# Altium PCB RFID2.PcbDoc (part 1 of 3)
Units mil, origin at the board's own origin, x right, y up, seen from the top; angles counter-clockwise.
Board outline 2824.02 x 3937.01 mil, 2 copper layers (Top Layer, Bottom Layer); 76 components, 32 nets, 236 pads, 16 vias.
Unrouted connection lines stored in the file: 34.
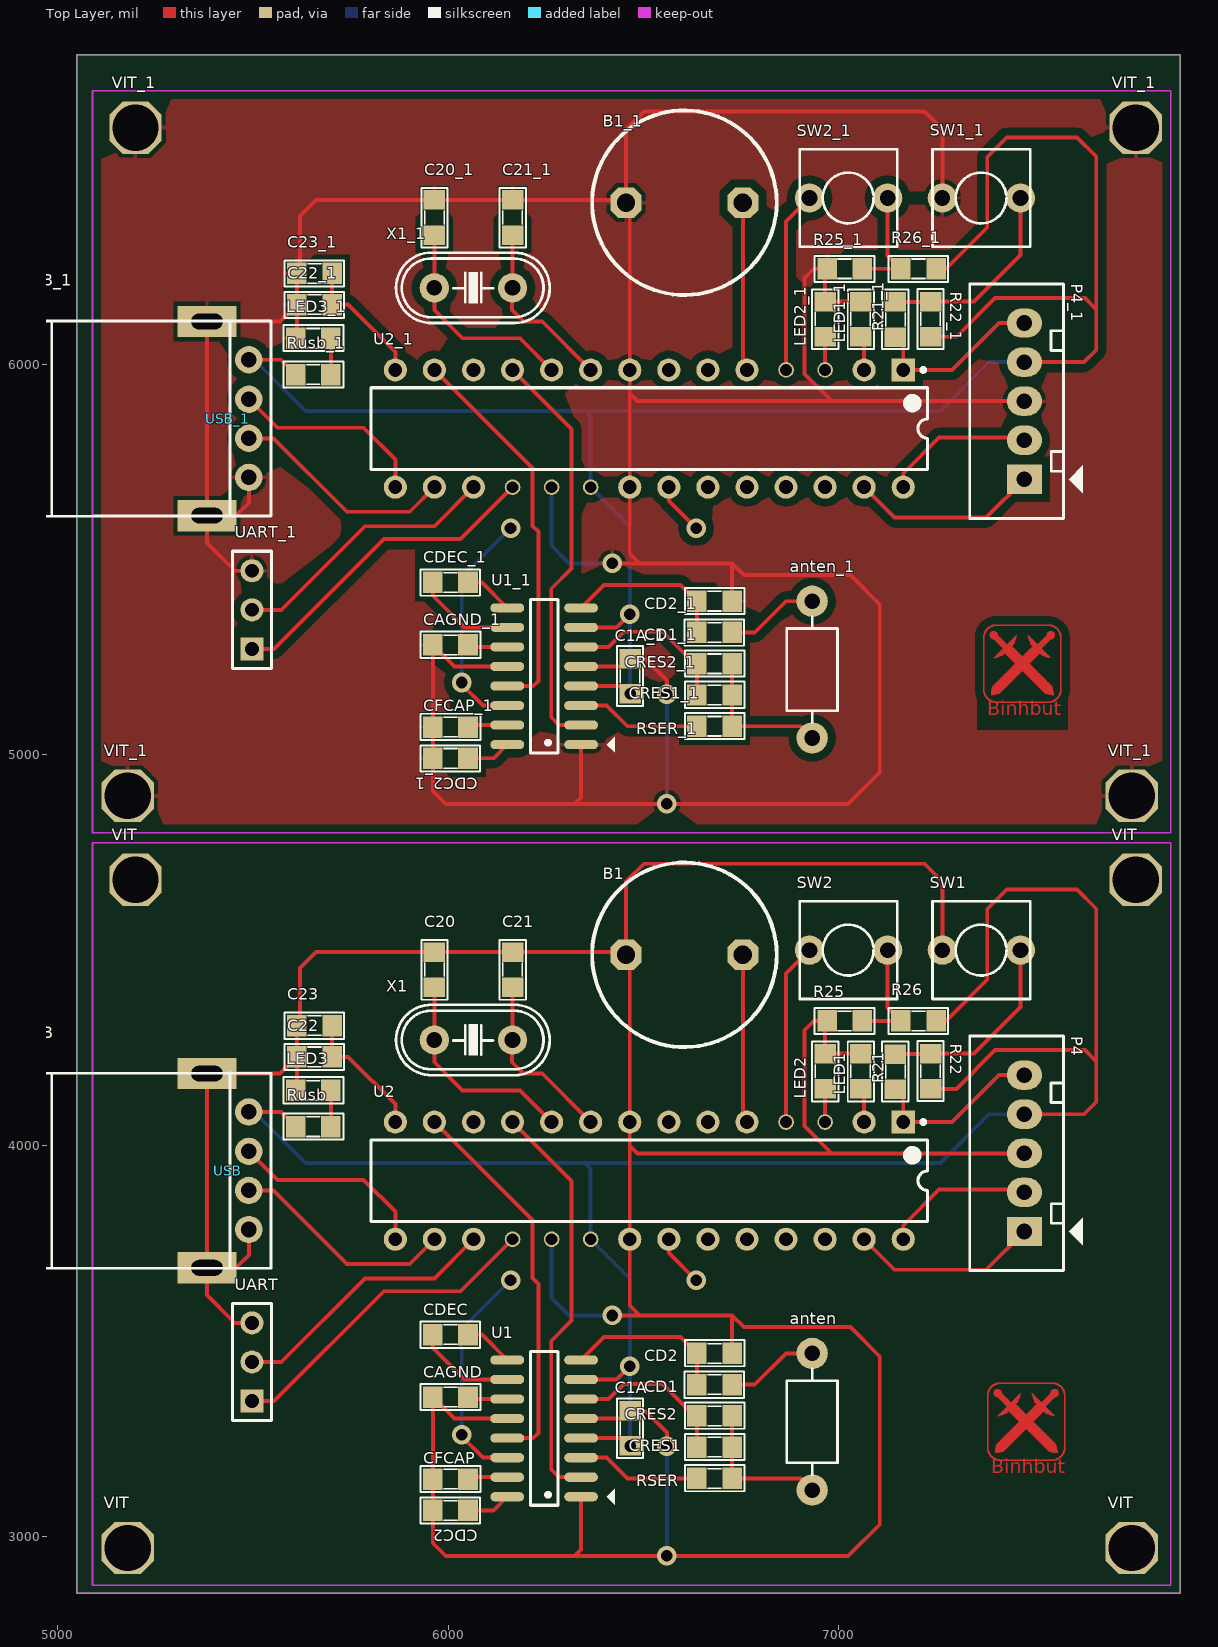
[diagram p0: Top Layer view]
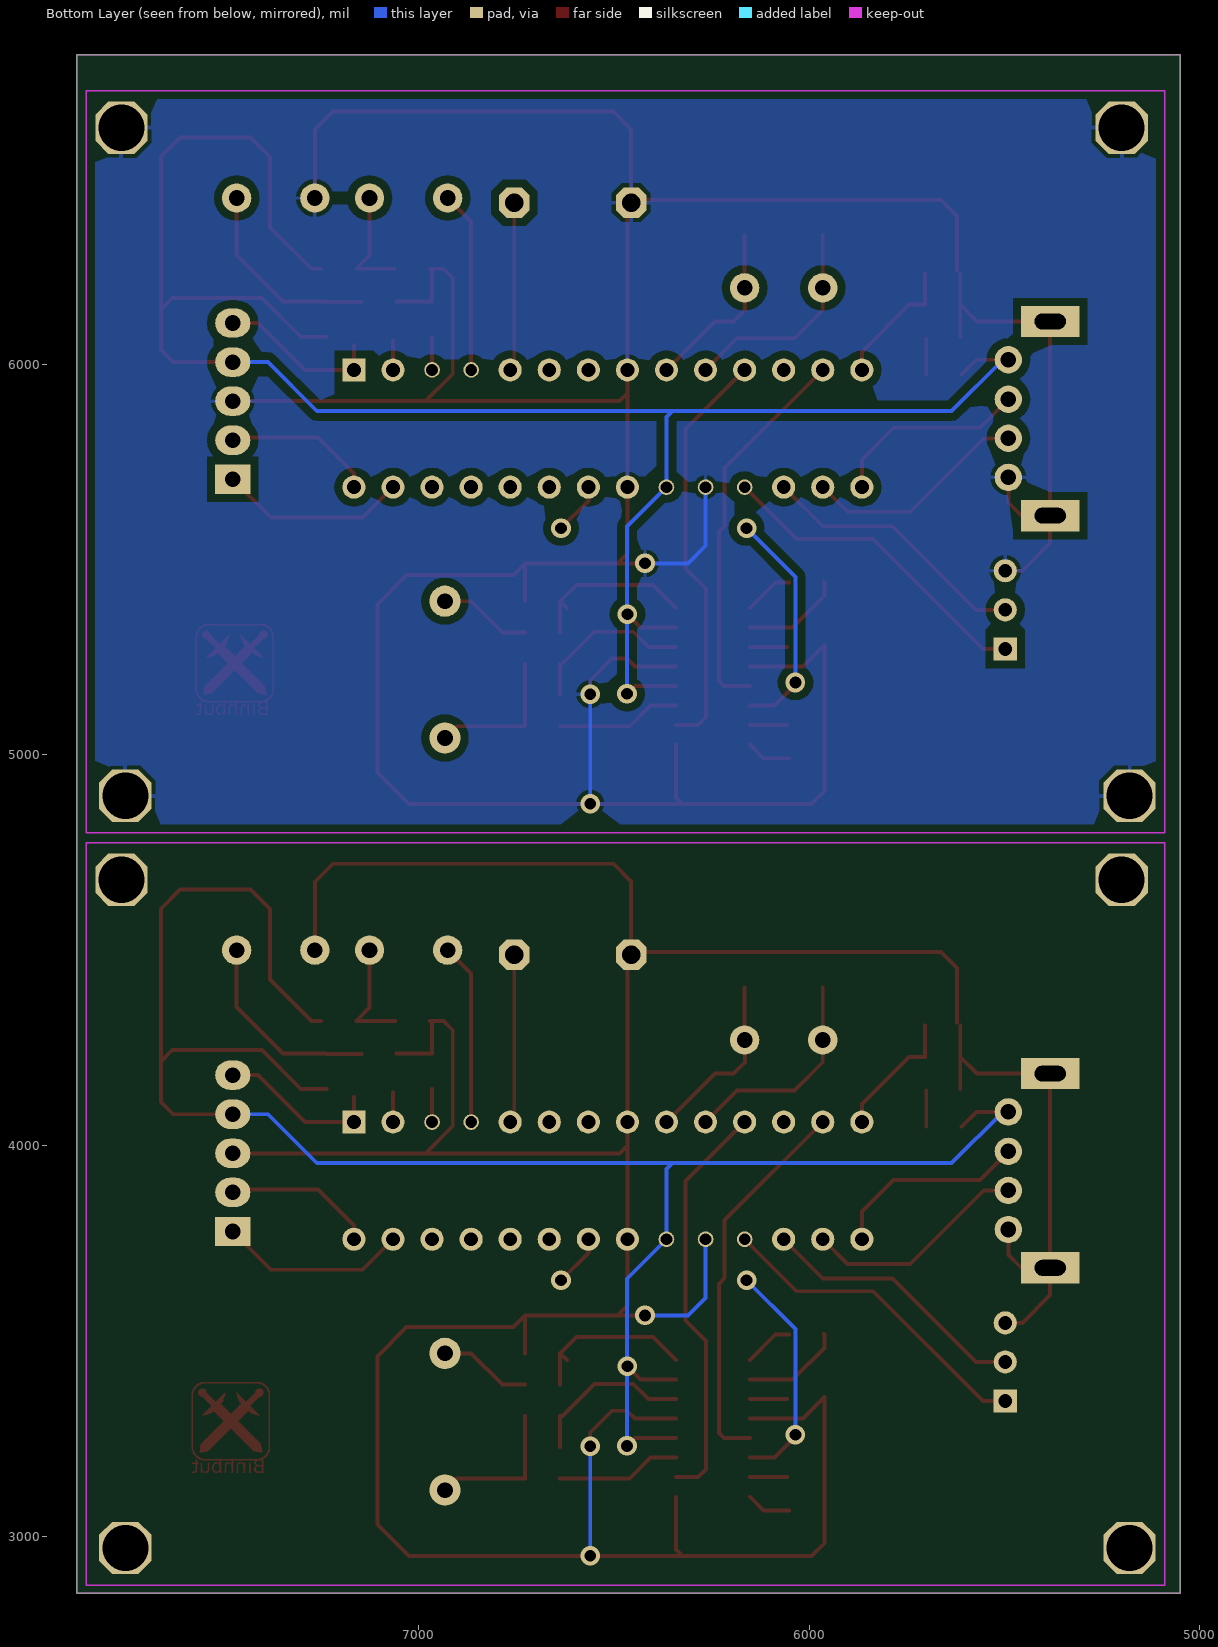
[diagram p1: Bottom Layer view, seen from below]
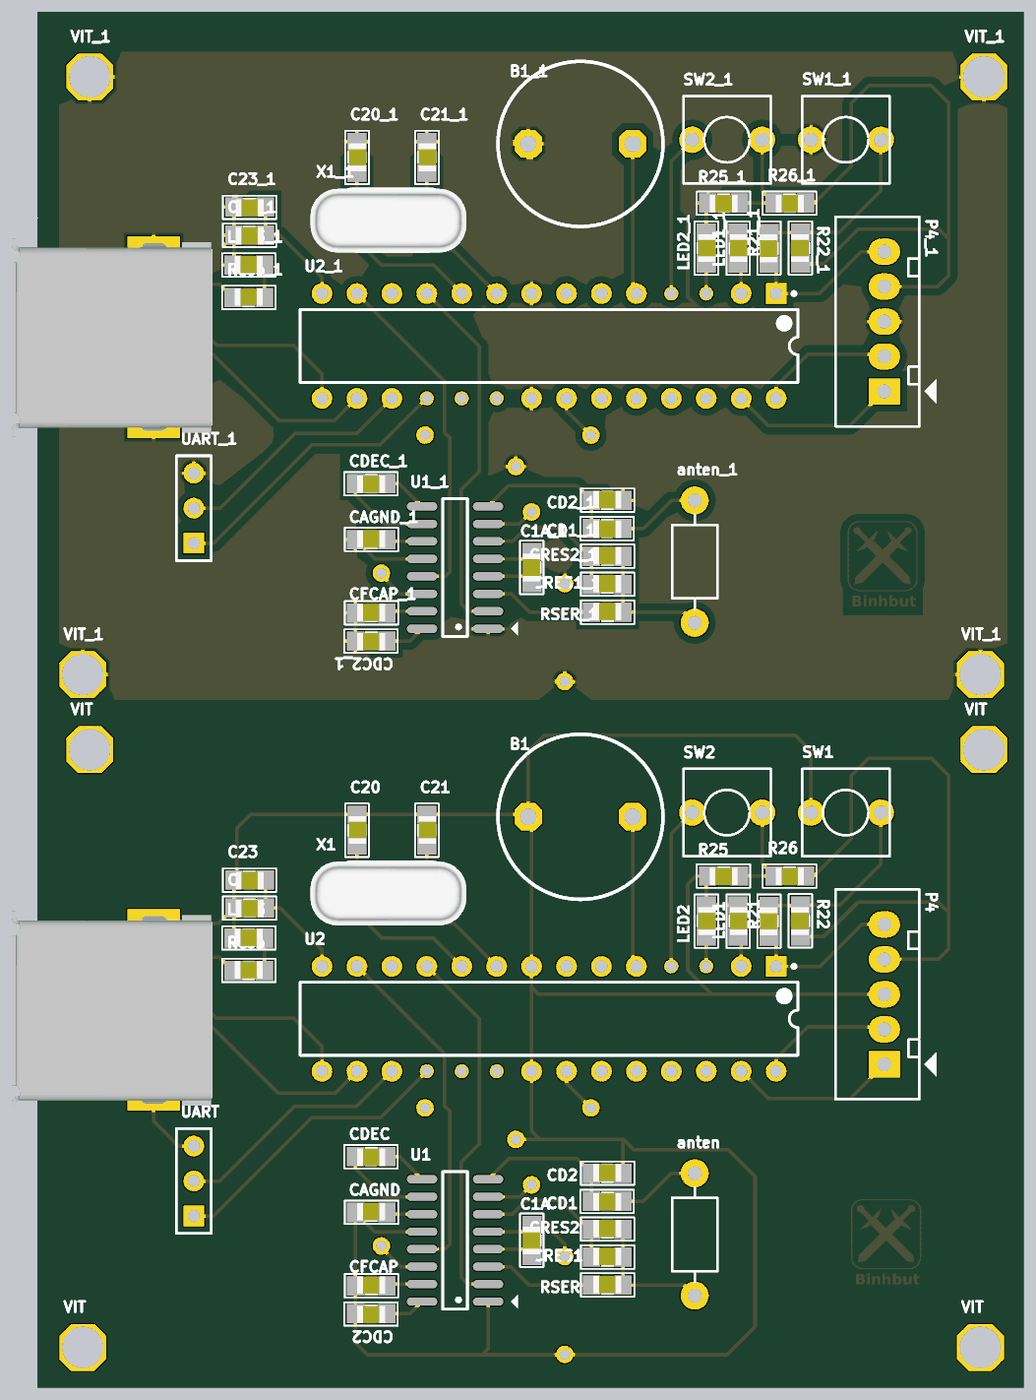
[diagram p4: 3D render of the assembled board from above, using the file's embedded part models]

## Layer stack, top to bottom
Top Solder: solder mask 0.4, Solder Resist, Dk 3.5
Top Layer: signal copper 1.4
Dielectric 1: dielectric 12.6, FR-4, Dk 4.8
Bottom Layer: signal copper 1.4
Bottom Solder: solder mask 0.4, Solder Resist, Dk 3.5

## Board outline
5050,2854.33 5050,6791.34 7874.02,6791.34 7874.02,2854.33

## Design rules (kind name [scope] priority, off if disabled: settings)
Clearance Clearance_1 [InNet('GND')] p1: gap=20
Clearance [All] p2: gap=10
PolygonConnect [All] p1: connectstyle=Relief reliefconductorwidth=10 reliefentries=4 polygonreliefangle="90 Angle" airgapwidth=10
RoomDefinition RFID2 [InComponentClass('RFID2')] p1: confinementstyle=ConfineIn formatcopy=TRUE lockcomponents=FALSE outline 0,0 2000,0 2000,1000 0,1000
RoutingVias [All] p1: holewidth=28 width=50 viastyle="Through Hole" minholewidth=28 minwidth=50 maxholewidth=60 maxwidth=60
SolderMaskExpansion [All] p1: expansion=4
Width [All] p1: maxlimit=50 minlimit=10 preferedwidth=10
29 further rules are at their usual default settings.

## Classes and differential pairs
component class RFID2: anten B1 C1A C20 C21 C22 C23 CAGND CD1 CD2 CDC2 CDEC CFCAP CRES1 CRES2 LED1 LED2 LED3 P4 R21 R22 R25 R26 RSER Rusb SW1 SW2 U1 U2 UART USB VIT1 VIT2 VIT3 VIT4 X1

## Components (designator, comment, footprint, x,y, rotation, side; value= is the part's Value field where it differs from the comment)
anten "60T 4*6cm" L/0.4 6932,3468 r270 top
anten_1 "60T 4*6cm" L/0.4 6932,5393 r270 top (schematic designator anten)
B1 "Buzzer" Buzzer_9x12mm 6605,4488 r180 top
B1_1 "Buzzer" Buzzer_9x12mm 6605,6413 r180 top (schematic designator B1)
C1A "104" SM-0805 6466,3276 r270 top
C1A_1 "104" SM-0805 6466,5201 r270 top (schematic designator C1A)
C20 "27pf" SM-0805 5965,4450 r90 top
C20_1 "27pf" SM-0805 5965,6375 r90 top (schematic designator C20)
C21 "27pf" SM-0805 6165,4450 r90 top
C21_1 "27pf" SM-0805 6165,6375 r90 top (schematic designator C21)
C22 "103" SM-0805 5658,4227 r0 top
C22_1 "103" SM-0805 5658,6152 r0 top (schematic designator C22)
C23 "103" SM-0805 5658,4307 r0 top
C23_1 "103" SM-0805 5658,6232 r0 top (schematic designator C23)
CAGND "104" SM-0805 6006,3356 r180 top
CAGND_1 "104" SM-0805 6006,5281 r180 top (schematic designator CAGND)
CD1 "47pF" SM-0805 6682,3388 r0 top
CD1_1 "47pF" SM-0805 6682,5313 r0 top (schematic designator CD1)
CD2 "102" SM-0805 6682,3468 r180 top
CD2_1 "102" SM-0805 6682,5393 r180 top (schematic designator CD2)
CDC2 "103" SM-0805 6006,3066 r0 top
CDC2_1 "103" SM-0805 6006,4991 r0 top (schematic designator CDC2)
CDEC "104" SM-0805 6006,3516 r0 top
CDEC_1 "104" SM-0805 6006,5441 r0 top (schematic designator CDEC)
CFCAP "103" SM-0805 6006,3146 r180 top
CFCAP_1 "103" SM-0805 6006,5071 r180 top (schematic designator CFCAP)
CRES1 "102" SM-0805 6682,3228 r180 top
CRES1_1 "102" SM-0805 6682,5153 r180 top (schematic designator CRES1)
CRES2 "102" SM-0805 6682,3308 r180 top
CRES2_1 "102" SM-0805 6682,5233 r180 top (schematic designator CRES2)
LED1 "LED3" SM-0805 7056,4190 r90 top
LED1_1 "LED3" SM-0805 7056,6115 r90 top (schematic designator LED1)
LED2 "" SM-0805 6965,4190 r90 top
LED2_1 "" SM-0805 6965,6115 r90 top (schematic designator LED2)
LED3 "" SM-0805 5655,4141 r180 top
LED3_1 "" SM-0805 5655,6066 r180 top (schematic designator LED3)
P4 "" CON5 7475,3780 r90 top
P4_1 "" CON5 7475,5705 r90 top (schematic designator P4)
R21 "1k" SM-0805 7145,4189 r270 top
R21_1 "1k" SM-0805 7145,6114 r270 top (schematic designator R21)
R22 "1k" SM-0805 7235,4190 r270 top
R22_1 "1k" SM-0805 7235,6115 r270 top (schematic designator R22)
R25 "1K" SM-0805 7015,4319 r0 top
R25_1 "1K" SM-0805 7015,6244 r0 top (schematic designator R25)
R26 "1K" SM-0805 7204,4319 r0 top
R26_1 "1K" SM-0805 7204,6244 r0 top (schematic designator R26)
RSER "10" SM-0805 6682,3148 r180 top
RSER_1 "10" SM-0805 6682,5073 r180 top (schematic designator RSER)
Rusb "1k" SM-0805 5655,4048 r180 top
Rusb_1 "1k" SM-0805 5655,5973 r180 top (schematic designator Rusb)
SW1 "SW" SW2 7265,4500 r0 top
SW1_1 "SW" SW2 7265,6425 r0 top (schematic designator SW1)
SW2 "SW" SW2 6925,4500 r0 top
SW2_1 "SW" SW2 6925,6425 r0 top (schematic designator SW2)
U1 "EM4095" SO-16 6246,3276 r180 top
U1_1 "EM4095" SO-16 6246,5201 r180 top (schematic designator U1)
U2 "PIC18F2550-I/SP" SPDIP300-SP28 6515,3910 r270 top
U2_1 "PIC18F2550-I/SP" SPDIP300-SP28 6515,5835 r270 top (schematic designator U2)
UART "Header 3" HDR1X3 5498,3346 r90 top
UART_1 "Header 3" HDR1X3 5498,5271 r90 top (schematic designator UART)
USB "USB-S" USB_B 5490,3785 r90 top
USB_1 "USB-S" USB_B 5490,5710 r90 top (schematic designator USB)
VIT "Comment" VIT2#1 7750,2970 r0 top
VIT "Comment" VIT2#1 7760,4680 r0 top
VIT "Comment" VIT2#1 5200,4680 r0 top
VIT "Comment" VIT2#1 5180,2970 r0 top
VIT1 "1" VIT2#2 242.79,909.07 r0 top
VIT2 "1" VIT2#2 80.93,909.07 r0 top
VIT3 "1" VIT2#2 566.5,909.07 r0 top
VIT4 "1" VIT2#2 404.65,909.07 r0 top
VIT_1 "Comment" VIT2#1 5180,4895 r0 top
VIT_1 "Comment" VIT2#1 5200,6605 r0 top
VIT_1 "Comment" VIT2#1 7760,6605 r0 top
VIT_1 "Comment" VIT2#1 7750,4895 r0 top
X1 "20Mhz" XT2 6065,4270 r0 top
X1_1 "20Mhz" XT2 6065,6195 r0 top (schematic designator X1)

## Footprints (in the part's own frame and the unit in brackets; to place one, negate y for a bottom-side part, rotate by r counter-clockwise, add the part's x,y. Pads: shape width x height; smd on the part's side, far side on the other; paste and mask are expansions set on the pad)
Buzzer_9x12mm [mm] "coi chip 5v 9x12mm"
  oct 2x2 hole 1.2: 1(-3.8,0) 2(3.8,0)
  silkscreen extent -6,-6 6,6
CON5 [mil] "CON5"
  rect 75x90 hole 40: 1(0,0)
  oval 75x90 hole 40: 2(100,0) 3(200,0) 4(300,0) 5(400,0)
  silkscreen extent -100,-150 500,140
HDR1X3 [mm] "Connector; Header; 3 Position"
  rect 1.5x1.5 hole 0.9: 1(0,0)
  round 1.5 hole 0.9: 2(2.54,0) 3(5.08,0)
  silkscreen extent -1.27,-1.27 6.35,1.27
L/0.4 [mil] "Inductor , 2 Pin, L 350mil, W 150 mil"
  round 80 hole 40: 1(0,0) 2(350,0)
  silkscreen extent 40,-65 310,65
SM-0805 [mil] "Compoment SMD 80x50mil"
  rect 50x55 smd: 1(-45,0) 2(45,0)
  silkscreen extent -77,-34 76,33, body extent -40,-27 40,23, height 24
SO-16 [mm] "SOIC, 16-Leads, Body 9.9x3.9mm, Pitch 1.27mm, IPC Medium Density"
  oval 2.2x0.6 smd: 1(-2.4,4.445) 2(-2.4,3.175) 3(-2.4,1.905) 4(-2.4,0.635) 5(-2.4,-0.635) 6(-2.4,-1.905) 7(-2.4,-3.175) 8(-2.4,-4.445) 9(2.4,-4.445) 10(2.4,-3.175) 11(2.4,-1.905) 12(2.4,-0.635) 13(2.4,0.635) 14(2.4,1.905) 15(2.4,3.175) 16(2.4,4.445)
  silkscreen extent -4.57,-5 0.9,5
SPDIP300-SP28 [mm] "DIP, 28-Leads, Row Spacing 7.62mm, Pitch 2.54mm, Body 34.9x6.8mm"
  rect 1.5x1.5 hole 0.9: 1(-3.81,16.51)
  round 1.5 hole 0.9: 2(-3.81,13.97) 5(-3.81,6.35) 6(-3.81,3.81) 7(-3.81,1.27) 8(-3.81,-1.27) 9(-3.81,-3.81) 10(-3.81,-6.35) 11(-3.81,-8.89) 12(-3.81,-11.43) 13(-3.81,-13.97) 14(-3.81,-16.51) 15(3.81,-16.51) 16(3.81,-13.97) 17(3.81,-11.43) 21(3.81,-1.27) 22(3.81,1.27) 23(3.81,3.81) 24(3.81,6.35) 25(3.81,8.89) 26(3.81,11.43) 27(3.81,13.97) 28(3.81,16.51)
  round 1.016 hole 0.762: 3(-3.81,11.43) 4(-3.81,8.89) 18(3.81,-8.89) 19(3.81,-6.35) 20(3.81,-3.81)
  silkscreen extent -3.93,-18.1 2.65,18.1, body extent -3.55,-18.1 3.55,18.1, height 5.08
SW2 [mil] "SW button 2pin, 250x 250 mil"
  round 75 hole 40: 1(0,0) 2(200,0)
  silkscreen extent -25,-125 225,125
USB_B [mil] "USB A connector, 4pin, For USB sing"
  round 70 hole 40: 1(0,0) 2(100,0) 3(200,0) 4(301,0)
  rect 80x150 hole 40 slot 80 at 90 deg: 5(-98,107) 6(399,107)
  silkscreen extent -100,-57 401,591, body extent -162,-58 460,513, height 278
VIT2#1 [mm] "Oc vit 3mm"
  oct 3.4x3.4 hole 3: 1(0,0)
VIT2#2 [mm] "Oc vit 3mm"
  oct 3.4x3.4 hole 3: 0(0,0)
XT2 [mil] "Footpin for Crystal 2 pin"
  round 75 hole 40: 1(-100,0) 2(100,0)
  silkscreen extent -198,-90 195,90, body extent -233,-93 213,90, height 138

## Part data
anten anten_1: library part L1, "Inductor"
C1A C1A_1: library part Cap, "Capacitor"
C20 C20_1 C21 C21_1: library part CapSMD, "Capacitor"
C22 C22_1 C23 C23_1 CAGND CAGND_1 CD1 CD1_1 CD2 CD2_1 CDC2 CDC2_1 CDEC CDEC_1 CFCAP CFCAP_1 CRES1 CRES1_1 CRES2 CRES2_1: library part CM, "Cap SMD"
LED1 LED1_1 LED2 LED2_1 LED3 LED3_1: library part LEDSMD, "LED 3mm"
P4 P4_1: library part "Header 5", "Header, 5-Pin"
R21 R21_1 R22 R22_1 Rusb Rusb_1: library part R, "Resistor 1/4W"
R25 R25_1 R26 R26_1 RSER RSER_1: library part RM, "Resistor SMD"
SW1 SW1_1 SW2 SW2_1: library part SW2, "Switch button 2 pin"
U2 U2_1: "High Performance, Enhanced Flash, USB Microcontroller with nanoWatt Technology, 32K Flash, 28-Pin SPDIP, Industrial Temperature Range"
UART UART_1: "Header, 3-Pin"
USB USB_1: library part USB_S, "USB connector"
VIT1 VIT2 VIT3 VIT4: library part VIT, "Oc Vit"
X1 X1_1: library part XT2, "Crystal For all Crystal 2pin."

## Via types
v1: diameter 50, hole 30, Top Layer to Bottom Layer, 16 vias

## Nets (pads, with @x,y where several pads share a name; then routed paths per layer and width w, separated by ;. In a path a pad name is that pad's centre, name@x,y a point inside that pad or via, vN(x,y) a via of type N, cw(c..) or ccw(c..) an arc to the next point about the centre after c; other vN are vias at no path point)
BUZZER: B1.1 B1_1.1 U2.5 U2_1.5 | length 835.2
  Top Layer w10: U2.5@6754.61,4070.39 B1.1@6754.61,4488 ; U2_1.5@6754.61,5995.39 B1_1.1@6754.61,6413
D+: U2.16 U2_1.16 USB.2 USB_1.2 | length 1157.9
  Top Layer w10: USB.2@5490,3885 5553,3885 5741,3697 5902,3697 U2.16@5965,3760 ; USB_1.2@5490,5810 5553,5810 5741,5622 5902,5622 U2_1.16@5965,5685
D-: U2.15 U2_1.15 USB.3 USB_1.3 | length 1019.6
  Top Layer w10: USB.3@5490,3985 5563,3912 5784,3912 5865,3831 U2.15@5865,3760 ; USB_1.3@5490,5910 5563,5837 5784,5837 5865,5756 U2_1.15@5865,5685
DEMOD_OUT: U1.13 U1_1.13 U2.13 U2_1.13 | length 1982.1
  Top Layer w10: U2.13@5965,4060 6216,3809 6216,3661 6231,3646 6231,3264 6218,3251 U1.13@6151.51,3251 ; U2_1.13@5965,5985 6216,5734 6216,5586 6231,5571 6231,5189 6218,5176 U1_1.13@6151.51,5176
GND: B1.2 B1_1.2 C1A.1 C1A_1.1 C20.2 C20_1.2 C21.2 C21_1.2 C22.1 C22_1.1 C23.1 C23_1.1 CAGND.2 CAGND_1.2 CD2.1 CD2_1.1 CDC2.1 CDC2_1.1 CFCAP.2 CFCAP_1.2 LED1.2 LED1_1.2 LED2.2 LED2_1.2 LED3.2 LED3_1.2 P4.3 P4_1.3 R25.1 R25_1.1 SW1.1 SW1_1.1 U1.1 U1.5 U1.12 U1_1.1 U1_1.5 U1_1.12 U2.8 U2.19 U2.21 U2_1.8 U2_1.19 U2_1.21 UART.3 UART_1.3 USB.1 USB_1.1 USB_1.5 USB_1.6 VIT.1 VIT_1.1 | length 20262.6
  Top Layer w10: 5394,4173 5383,4184 ; USB_1.6@5394,6098 USB_1.6@5383,6109 ; USB.1@5490,3785 5490,3720 5457,3687 5383,3687 ; USB_1.1@5490,5710 5490,5645 5457,5612 USB_1.5@5383,5612 ; UART.3@5498,3546 5454,3546 5383,3617 5383,3687 ; UART_1.3@5498,5471 5454,5471 5383,5542 USB_1.5@5383,5612 ; LED3.2@5613,4144 C22.1@5613,4227 ; C23.1@5613,4307 C22.1@5613,4227 ; LED3_1.2@5613,6069 C22_1.1@5613,6152 ; C23_1.1@5613,6232 C22_1.1@5613,6152 ; C23.1@5621,4315 5621,4454 5662,4495 C20.2@5965,4495 C21.2@6165,4495 B1.2@6448.39,4495 ; C23_1.1@5621,6240 5621,6379 5662,6420 C20_1.2@5965,6420 C21_1.2@6165,6420 B1_1.2@6448.39,6420 ; U1.12@6151.51,3301 6016,3301 CAGND.2@5961,3356 CFCAP.2@5961,3146 CDC2.1@5961,3066 5961,2982 5994,2949 v1@6560,2949 ; U1_1.12@6151.51,5226 6016,5226 CAGND_1.2@5961,5281 CFCAP_1.2@5961,5071 CDC2_1.1@5961,4991 5961,4907 5994,4874 v1@6560,4874 ; 6324,2949 6340.49,2965.49 U1.1@6340.49,3101 ; 6324,4874 6340.49,4890.49 U1_1.1@6340.49,5026 ; U1.5@6340.49,3301 6446,3301 C1A.1@6466,3321 6504,3321 6560,3265 v1(6560,3230) ; U1_1.5@6340.49,5226 6446,5226 C1A_1.1@6466,5246 6504,5246 6560,5190 v1(6560,5155) ; v1(6420,3565) 6727,3565 ; v1(6420,5490) 6727,5490 ; B1.2@6455.39,4488 6455.39,4675.39 6501,4721 7219,4721 7265,4675 SW1.1@7265,4500 ; B1_1.2@6455.39,6413 6455.39,6600.39 6501,6646 7219,6646 7265,6600 SW1_1.1@7265,6425 ; B1.2@6465,4478.39 U2.8@6465,4060 6465,4000 ; B1_1.2@6465,6403.39 U2_1.8@6465,5985 6465,5925 ; 6490,3565 6465,3590 U2.21@6465,3760 6465,4000 ; 6490,5490 6465,5515 U2_1.21@6465,5685 6465,5925 ; v1(6560,2950) v1@6560,2949 ; v1(6560,4875) v1@6560,4874 ; CD2.1@6727,3468 6727,3565 ; CD2_1.1@6727,5393 6727,5490 ; LED1.2@7056,4235 LED2.2@6965,4235 6965,4314 R25.1@6970,4319 6936,4319 6912,4295 6912,4050.03 6982.03,3980 ; LED1_1.2@7056,6160 LED2_1.2@6965,6160 6965,6239 R25_1.1@6970,6244 6936,6244 6912,6220 6912,5975.03 6982.03,5905 ; P4.3@7475,3980 6982.03,3980 ; P4_1.3@7475,5905 6982.03,5905 ; 5383,3687 5383,4184 ; 5383,4184 5570,4184 C22.1@5613,4227 ; USB_1.5@5383,5612 USB_1.6@5383,6109 ; USB_1.6@5383,6109 5570,6109 C22_1.1@5613,6152 ; 6465,4000 6485,3980 6982.03,3980 ; 6465,5925 6485,5905 6982.03,5905 ; v1@6560,2949 7024,2949 7105,3030 7105,3460 7030,3535 6757,3535 6727,3565 ; v1@6560,4874 7024,4874 7105,4955 7105,5385 7030,5460 6757,5460 6727,5490
  Bottom Layer w10: U2.19@6265,3760 6265,3610 6310,3565 v1(6420,3565) ; U2_1.19@6265,5685 6265,5535 6310,5490 v1(6420,5490) ; v1(6560,2950) v1(6560,3230) ; v1(6560,4875) v1(6560,5155)
LED1: LED1.1 LED1_1.1 U2.2 U2_1.2 | length 152
  Top Layer w10: U2.2@7065,4060 LED1.1@7065,4136 ; U2_1.2@7065,5985 LED1_1.1@7065,6061
LED2: LED2.1 LED2_1.1 U2.3 U2_1.3 | length 170
  Top Layer w10: U2.3@6965,4060 LED2.1@6965,4145 ; U2_1.3@6965,5985 LED2_1.1@6965,6070
Netanten_1: anten.1 anten_1.1 CD1.2 CD1_1.2 | length 476.3
  Top Layer w10: CD1.2@6727,3388 6785,3388 6865,3468 anten.1@6932,3468 ; CD1_1.2@6727,5313 6785,5313 6865,5393 anten_1.1@6932,5393
Netanten_2: anten.2 anten_1.2 CRES1.1 CRES1_1.1 CRES2.1 CRES2_1.1 RSER.1 RSER_1.1 | length 754.9
  Top Layer w10: CRES2.1@6727,3308 CRES1.1@6727,3228 RSER.1@6727,3148 6902,3148 anten.2@6932,3118 ; CRES2_1.1@6727,5233 CRES1_1.1@6727,5153 RSER_1.1@6727,5073 6902,5073 anten_1.2@6932,5043
NetC22_2: C22.2 C22_1.2 C23.2 C23_1.2 U2.14 U2_1.14 | length 676.2
  Top Layer w10: C23.2@5703,4307 C22.2@5703,4227 5744,4227 5865,4106 U2.14@5865,4060 ; C23_1.2@5703,6232 C22_1.2@5703,6152 5744,6152 5865,6031 U2_1.14@5865,5985
NetCAGND_1: CAGND.1 CAGND_1.1 U1.11 U1_1.11 | length 191
  Top Layer w10: CAGND.1@6056,3351 U1.11@6151.51,3351 ; CAGND_1.1@6056,5276 U1_1.11@6151.51,5276
NetCD1_1: CD1.1 CD1_1.1 CD2.2 CD2_1.2 U1.8 U1_1.8 | length 884.8
  Top Layer w10: U1.8@6340.49,3451 6399.49,3510 6595,3510 CD2.2@6637,3468 ; U1_1.8@6340.49,5376 6399.49,5435 6595,5435 CD2_1.2@6637,5393 ; CD2.2@6620,3451 CD2.2@6637,3468 ; CD2_1.2@6620,5376 CD2_1.2@6637,5393 ; CD1.1@6637,3388 CD2.2@6637,3468 ; CD1_1.1@6637,5313 CD2_1.2@6637,5393
NetCDC2_2: CDC2.2 CDC2_1.2 U1.16 U1_1.16 | length 230
  Top Layer w10: CDC2.2@6051,3066 6116.51,3066 U1.16@6151.51,3101 ; CDC2_1.2@6051,4991 6116.51,4991 U1_1.16@6151.51,5026
NetCDEC_1: CDEC.1 CDEC_1.1 U1.10 U1_1.10 | length 519
  Top Layer w10: CDEC.1@5962,3517 CDEC.1@5961,3516 5961,3482 6042,3401 U1.10@6151.51,3401 ; CDEC_1.1@5962,5442 CDEC_1.1@5961,5441 5961,5407 6042,5326 U1_1.10@6151.51,5326
NetCDEC_2: CDEC.2 CDEC_1.2 U1.9 U1_1.9 | length 254.9
  Top Layer w10: CDEC.2@6051,3516 6086.51,3516 U1.9@6151.51,3451 ; CDEC_1.2@6051,5441 6086.51,5441 U1_1.9@6151.51,5376
NetCFCAP_1: CFCAP.1 CFCAP_1.1 U1.15 U1_1.15 | length 191
  Top Layer w10: CFCAP.1@6056,3151 U1.15@6151.51,3151 ; CFCAP_1.1@6056,5076 U1_1.15@6151.51,5076
NetCRES1_2: CRES1.2 CRES1_1.2 CRES2.2 CRES2_1.2 U1.6 U1_1.6 | length 853.3
  Top Layer w10: U1.6@6340.49,3351 6411,3351 6450,3390 6549,3390 6631,3308 CRES2.2@6637,3308 CRES1.2@6637,3228 ; U1_1.6@6340.49,5276 6411,5276 6450,5315 6549,5315 6631,5233 CRES2_1.2@6637,5233 CRES1_1.2@6637,5153
NetLED3_1: LED3.1 LED3_1.1 Rusb.1 Rusb_1.1 | length 186
  Top Layer w10: Rusb.1@5700,4048 LED3.1@5700,4141 ; Rusb_1.1@5700,5973 LED3_1.1@5700,6066
NetR21_1: R21.1 R21_1.1 R22.1 R22_1.1 SW1.2 SW1_1.2 | length 1031.4
  Top Layer w10: R21.1@7145,4234 7234,4234 R22.1@7235,4235 7346,4235 7465,4354 SW1.2@7465,4500 ; R21_1.1@7145,6159 7234,6159 R22_1.1@7235,6160 7346,6160 7465,6279 SW1_1.2@7465,6425
NetR25_2: R25.2 R25_1.2 R26.1 R26_1.1 SW2.2 SW2_1.2 | length 588.2
  Top Layer w10: R25.2@7060,4319 R26.1@7159,4319 7125,4353 SW2.2@7125,4500 ; R25_1.2@7060,6244 R26_1.1@7159,6244 7125,6278 SW2_1.2@7125,6425
NetRSER_2: RSER.2 RSER_1.2 U1.3 U1_1.3 | length 636.9
  Top Layer w10: U1.3@6340.49,3201 6406,3201 6459,3148 RSER.2@6637,3148 ; U1_1.3@6340.49,5126 6406,5126 6459,5073 RSER_1.2@6637,5073
NetSW2_1: SW2.1 SW2_1.1 U2.4 U2_1.4 | length 929.7
  Top Layer w10: U2.4@6865,4060 6865,4440 SW2.1@6925,4500 ; U2_1.4@6865,5985 6865,6365 SW2_1.1@6925,6425
OSC1: C21.1 C21_1.1 U2.9 U2_1.9 X1.2 X1_1.2 | length 910.7
  Top Layer w10: X1.2@6164,4269 6164,4213 6193,4184 6241,4184 U2.9@6365,4060 ; X1_1.2@6164,6194 6164,6138 6193,6109 6241,6109 U2_1.9@6365,5985 ; X1.2@6165,4270 C21.1@6165,4405 ; X1_1.2@6165,6195 C21_1.1@6165,6330
OSC2: C20.1 C20_1.1 U2.10 U2_1.10 X1.1 X1_1.1 | length 1110.7
  Top Layer w10: C20.1@5965,4405 X1.1@5965,4270 5965,4213 6037,4141 6184,4141 U2.10@6265,4060 ; C20_1.1@5965,6330 X1_1.1@5965,6195 5965,6138 6037,6066 6184,6066 U2_1.10@6265,5985
PGC: P4.1 P4_1.1 U2.27 U2_1.27 | length 965.8
  Top Layer w10: U2.27@7065,3760 7143,3682 7377,3682 P4.1@7475,3780 ; U2_1.27@7065,5685 7143,5607 7377,5607 P4_1.1@7475,5705
PGD: P4.2 P4_1.2 U2.28 U2_1.28 | length 752.2
  Top Layer w10: U2.28@7165,3760 7165,3795 7257,3887 P4.2@7468,3887 ; U2_1.28@7165,5685 7165,5720 7257,5812 P4_1.2@7468,5812
RDY/CLK: U1.2 U1_1.2 U2.11 U2_1.11 | length 2115.7
  Top Layer w10: U2.11@6165,4060 6316,3909 6316,3552 6264,3500 6264,3171 6284,3151 U1.2@6340.49,3151 ; U2_1.11@6165,5985 6316,5834 6316,5477 6264,5425 6264,5096 6284,5076 U1_1.2@6340.49,5076
RESET: P4.5 P4_1.5 R21.2 R21_1.2 U2.1 U2_1.1 | length 847.4
  Top Layer w10: R21.2@7165,4124 U2.1@7165,4060 7290,4060 7410,4180 P4.5@7475,4180 ; R21_1.2@7165,6049 U2_1.1@7165,5985 7290,5985 7410,6105 P4_1.5@7475,6105
RX: U2.18 U2_1.18 UART.1 UART_1.1 | length 1677
  Top Layer w10: UART.1@5498,3346 5555,3346 5836,3627 6032,3627 U2.18@6165,3760 ; UART_1.1@5498,5271 5555,5271 5836,5552 6032,5552 U2_1.18@6165,5685
SHD: U1.14 U1_1.14 U2.22 U2_1.22 | length 1449.3
  Top Layer w10: v1(6035,3260) 6035,3255 6089,3201 U1.14@6151.51,3201 ; v1(6035,5185) 6035,5180 6089,5126 U1_1.14@6151.51,5126 ; U2.22@6565,3760 6565,3725 v1(6635,3655) ; U2_1.22@6565,5685 6565,5650 v1(6635,5580)
  Bottom Layer w10: v1(6035,3260) 6035,3530 v1(6160,3655) ; v1(6035,5185) 6035,5455 v1(6160,5580)
TX: U2.17 U2_1.17 UART.2 UART_1.2 | length 1394.1
  Top Layer w10: UART.2@5498,3446 5573,3446 5787,3660 5965,3660 U2.17@6065,3760 ; UART_1.2@5498,5371 5573,5371 5787,5585 5965,5585 U2_1.17@6065,5685
VCC: C1A.2 C1A_1.2 P4.4 P4_1.4 R22.2 R22_1.2 R26.2 R26_1.2 Rusb.2 Rusb_1.2 U1.4 U1.7 U1_1.4 U1_1.7 U2.20 U2_1.20 USB.4 USB_1.4 | length 10145.4
  Top Layer w10: USB.4@5490,4086 5572,4086 Rusb.2@5610,4048 ; USB_1.4@5490,6011 5572,6011 Rusb_1.2@5610,5973 ; U1.4@6340.49,3251 C1A.2@6446,3251 ; U1.7@6340.49,3401 6431,3401 v1(6465,3435) ; U1_1.4@6340.49,5176 C1A_1.2@6446,5176 ; U1_1.7@6340.49,5326 6431,5326 v1(6465,5360) ; R22.2@7235,4145 7301,4145 7400,4244 7630,4244 7659,4215 ; R22_1.2@7235,6070 7301,6070 7400,6169 7630,6169 7659,6140 ; R26.2@7249,4319 7274,4319 7380,4425 7380,4605 7430,4655 7610,4655 7659,4606 7659,4215 ; R26_1.2@7249,6244 7274,6244 7380,6350 7380,6530 7430,6580 7610,6580 7659,6531 7659,6140 ; P4.4@7475,4080 7628,4080 7659,4111 7659,4215 ; P4_1.4@7475,6005 7628,6005 7659,6036 7659,6140
  Bottom Layer w10: USB.4@5504,4086 5635,3955 6350,3955 ; USB_1.4@5504,6011 5635,5880 6350,5880 ; v1(6466,3231) 6466,3659 U2.20@6365,3760 6365,3940 6350,3955 ; v1(6466,5156) 6466,5584 U2_1.20@6365,5685 6365,5865 6350,5880 ; P4.4@7475,4080 7385,4080 7260,3955 6350,3955 ; P4_1.4@7475,6005 7385,6005 7260,5880 6350,5880
pads on no net: U2.6 U2.7 U2.12 U2.23 U2.24 U2.25 U2.26 U2_1.6 U2_1.7 U2_1.12 U2_1.23 U2_1.24 U2_1.25 U2_1.26 USB.5 USB.6 VIT1.0 VIT2.0 VIT3.0 VIT4.0
copper on no net: | length 24386